# Altium PCB PCB.PcbDoc
Units mm, origin at the board's own origin, x right, y up, seen from the top; angles counter-clockwise.
Board outline 152.4 x 101.6 mm, 2 copper layers (Top Layer, Bottom Layer); 10 components, 16 nets, 68 pads, 5 vias.
Unrouted connection lines stored in the file: 1.
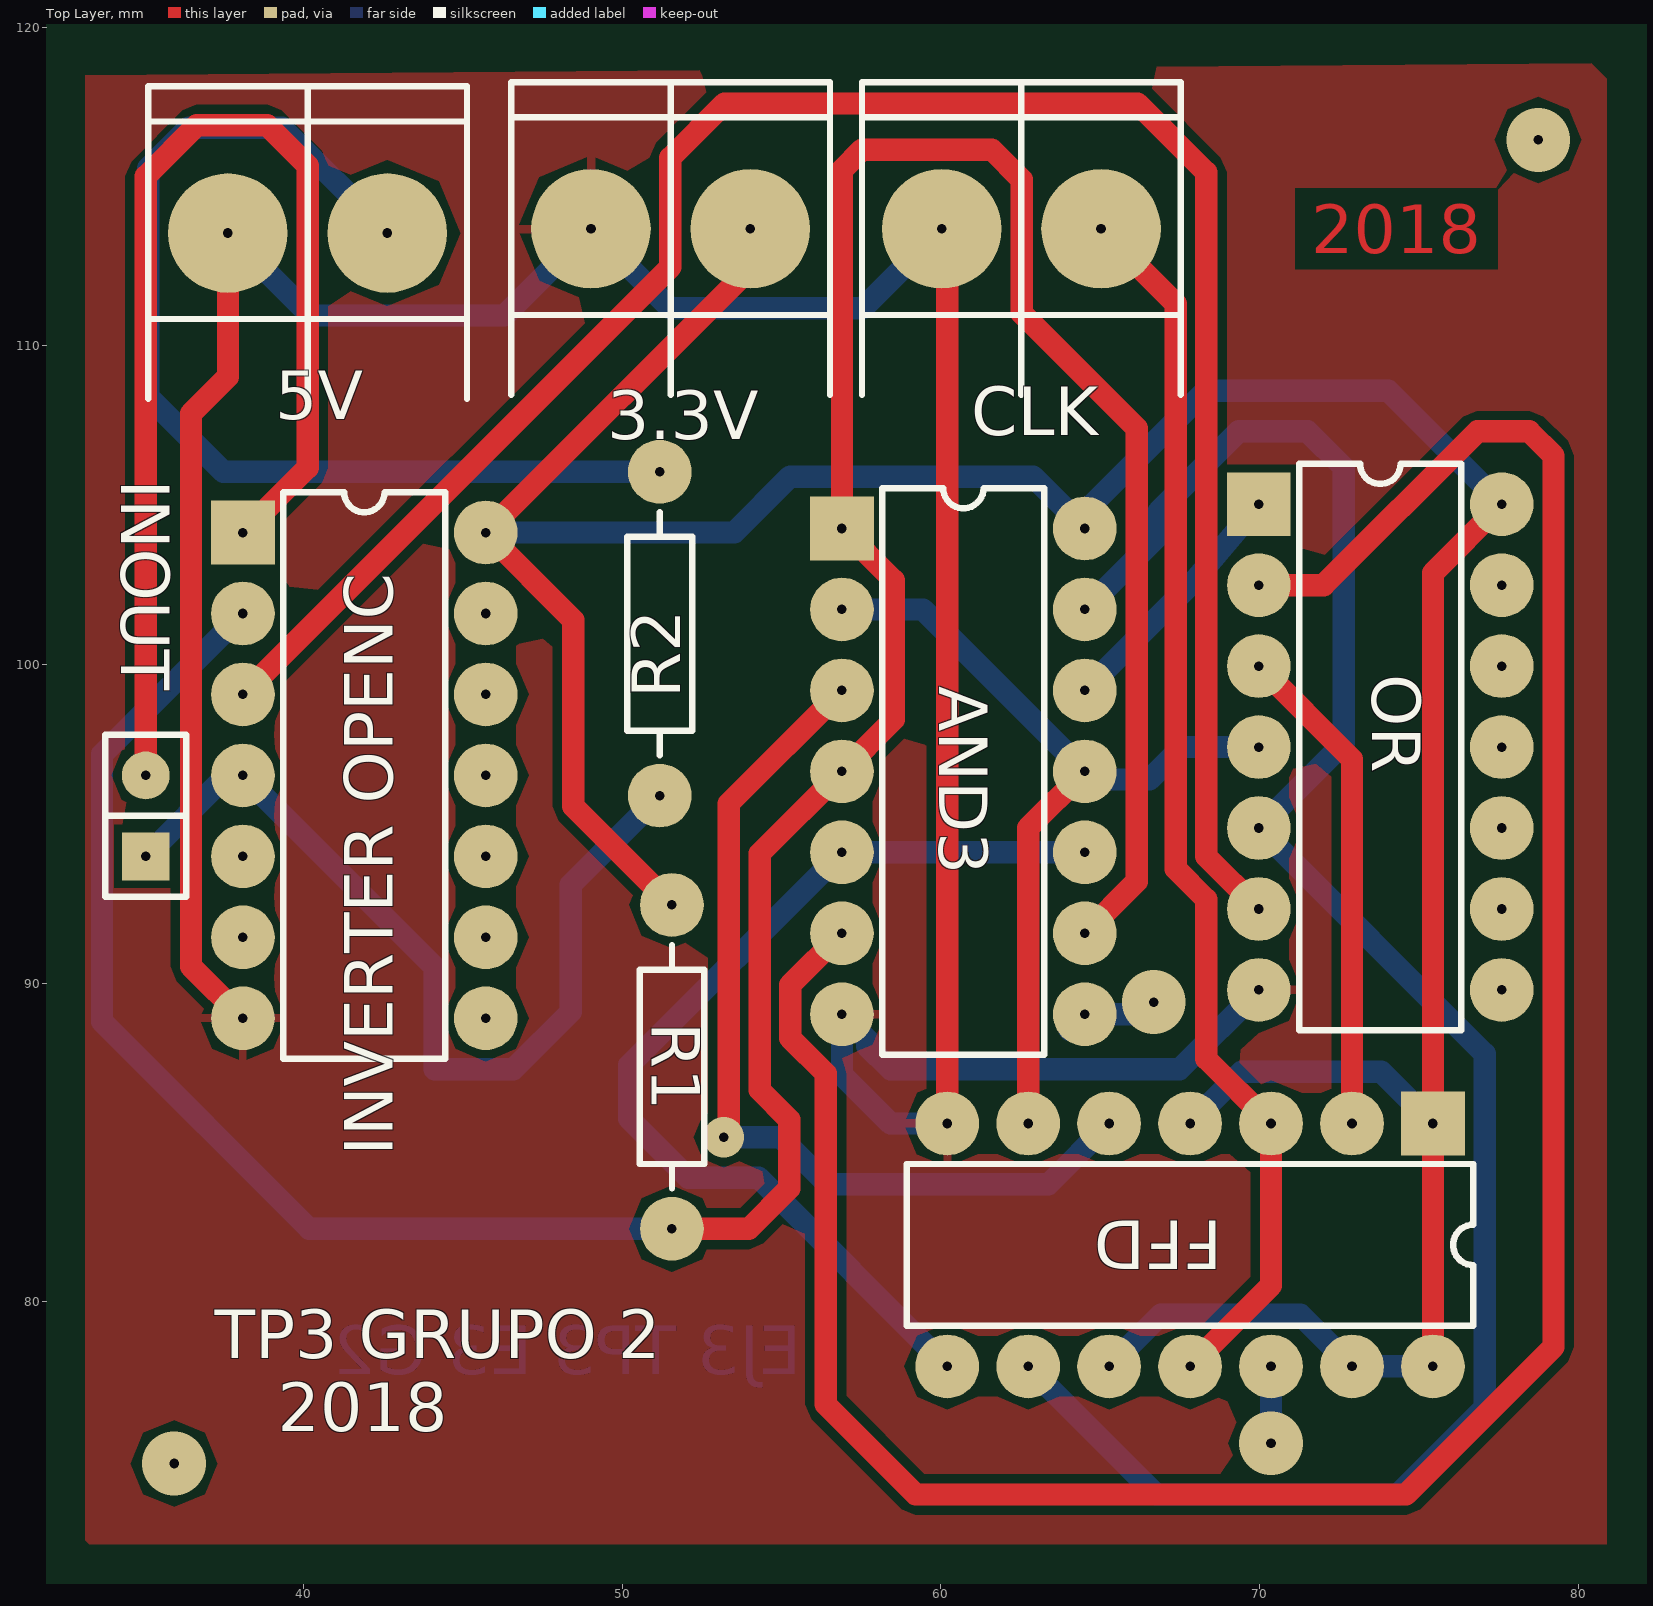
[diagram p0: Top Layer view]
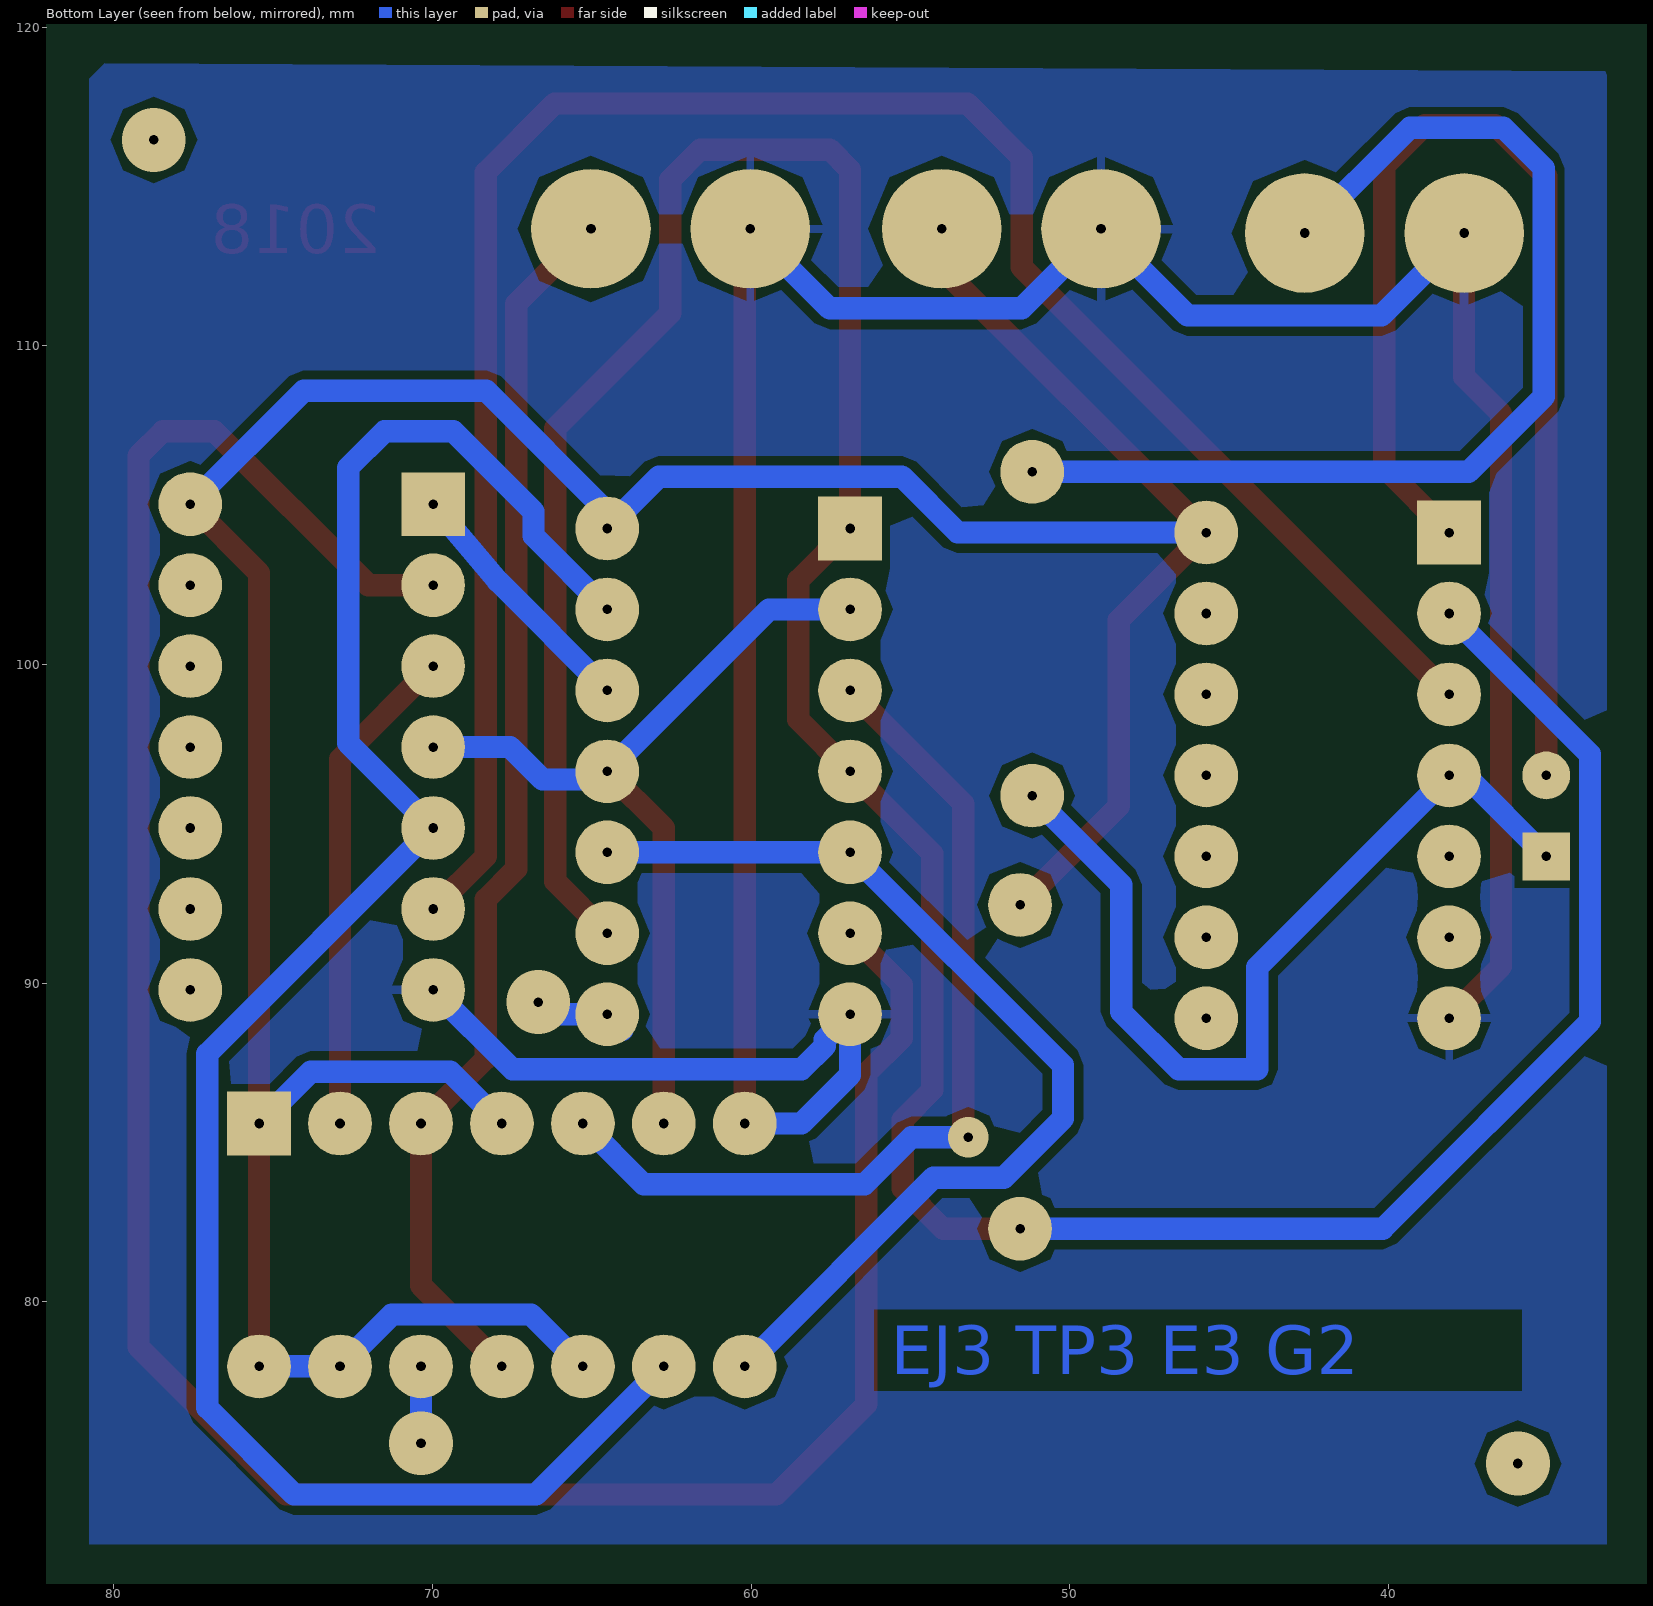
[diagram p1: Bottom Layer view, seen from below]
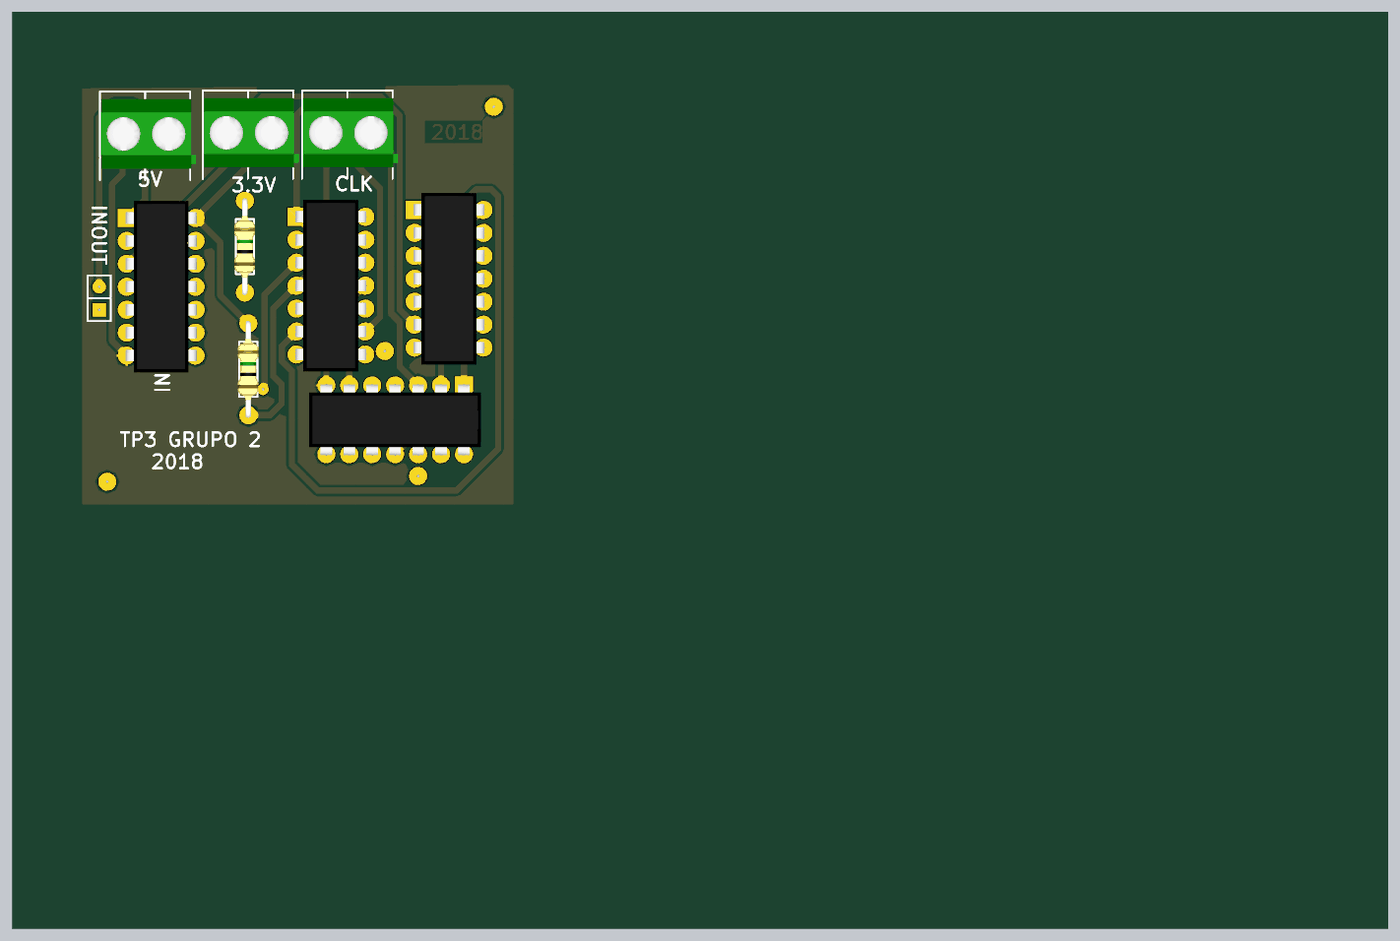
[diagram p2: 3D render of the assembled board from above, using the file's embedded part models]

## Layer stack, top to bottom
Top Solder: solder mask 0.0102, Solder Resist, Dk 3.5
Top Layer: signal copper 0.0356
Dielectric 1: dielectric 0.32, FR-4, Dk 4.8
Bottom Layer: signal copper 0.0356
Bottom Solder: solder mask 0.0102, Solder Resist, Dk 3.5

## Board outline
25.4,25.4 177.8,25.4 177.8,127 25.4,127

## Design rules (kind name [scope] priority, off if disabled: settings)
Clearance [All] p1: gap=0.254 ignorepadtopadclearanceinfootprint=FALSE except(0: Arc-Hole Track-Hole SMDPad-Hole THPad-Hole Via-Hole Fill-Hole Poly-Hole Region-Hole Text-Hole)
PolygonConnect [All] p1: connectstyle=Relief reliefconductorwidth=0.254 reliefentries=4 polygonreliefangle="90 Angle" airgapwidth=0.254
RoutingVias [All] p1: holewidth=0.711 width=1.27 viastyle="Through Hole" minholewidth=0.711 minwidth=1.27 maxholewidth=0.711 maxwidth=1.27
SolderMaskExpansion [All] p1: expansion=0.102
Width [All] p1: maxlimit=0.7 minlimit=0.7 preferedwidth=0.7 minimp=50.000000 maximp=50.000000 favimp=50.000000
30 further rules are at their usual default settings.

## Components (designator, comment, footprint, x,y, rotation, side; value= is the part's Value field where it differs from the comment)
3.3V "BORNERA 2" BORNERA2 51.522,113.665 r270 top
5V "BORNERA 2" BORNERA2 40.132,113.538 r270 top
AND3 "74HC11" DIP14 56.896,104.267 r0 top
CLK "BORNERA 2" BORNERA2 62.524,113.665 r270 top
FFD "74HC74" DIP14 75.438,85.598 r270 top
INOUT "CON2" SIP2 35.052,95.25 r90 top
"INVERTER OPENC" "74LS05" DIP14 38.1,104.14 r0 top
OR "74HC32" DIP14 69.977,105.029 r0 top
R1 "10K" RES400 51.562,82.296 r90 top
R2 "10K" RES400 51.181,95.885 r90 top

## Footprints (in the part's own frame and the unit in brackets; to place one, negate y for a bottom-side part, rotate by r counter-clockwise, add the part's x,y. Pads: shape width x height; smd on the part's side, far side on the other; paste and mask are expansions set on the pad)
BORNERA2 [mm] "Bornera con Tornillos 5mm separación"
  round 3.75 hole 0.3: 1(0,2.5) 2(0,-2.5)
  silkscreen extent -4.6,-5 5.2,5, body extent -3.76,-4.89 3.94,5.61, height 10
DIP14 [mm]
  rect 2x2 hole 0.3: 1(0,0)
  round 2 hole 0.3: 2(0,-2.54) 3(0,-5.08) 4(0,-7.62) 5(0,-10.16) 6(0,-12.7) 7(0,-15.24) 8(7.62,-15.24) 9(7.62,-12.7) 10(7.62,-10.16) 11(7.62,-7.62) 12(7.62,-5.08) 13(7.62,-2.54) 14(7.62,0)
  silkscreen extent 1.27,-16.51 6.35,1.27, body extent -0.13,-17.14 7.75,1.9, height 4.19
RES400 [mm]
  round 2 hole 0.3: 1(0,0) 2(10.16,0)
  silkscreen extent 1.27,-1.02 8.89,1.02, body extent -0.3,-1.14 10.46,1.17, height 2.43
SIP2 [mm]
  rect 1.5x1.5 hole 0.3: 1(-1.27,0)
  round 1.5 hole 0.3: 2(1.27,0)
  silkscreen extent -2.54,-1.27 2.54,1.27

## Part data
AND3 FFD "INVERTER OPENC" OR: library part IC_DIP14
R1 R2: library part RES

## Via types
v1: diameter 2, hole 0.3, Top Layer to Bottom Layer, 4 vias
v2: diameter 1.27, hole 0.3, Top Layer to Bottom Layer, 1 vias

## Nets (pads, with @x,y where several pads share a name; then routed paths per layer and width w, separated by ;. In a path a pad name is that pad's centre, name@x,y a point inside that pad or via, vN(x,y) a via of type N, cw(c..) or ccw(c..) an arc to the next point about the centre after c; other vN are vias at no path point)
+5: 5V.1 R2.2 | length 33.6
  Bottom Layer w0.7: 5V.1 39.33,116.84 36.398,116.84 35.128,115.57 35.128,108.407 37.49,106.045 R2.2
CLK: CLK.1 FFD.3 FFD.11 | length 38.9
  Top Layer w0.7: CLK.1 67.372,111.317 67.372,93.585 68.326,92.631 68.326,87.63 FFD.3 70.358,80.518 FFD.11
D1: FFD.2 OR.3 | length 15.6
  Top Layer w0.7: OR.3 72.898,97.028 FFD.2
D2: AND3.8 FFD.12 | length 5.1
  Bottom Layer w0.7: AND3.8@64.033,88.544 AND3.8 v1@66.548,89.027 ; v1(70.358,75.565) FFD.12
  other v1: 66.675,89.408
GND: 3.3V.2 5V.2 "INVERTER OPENC.7" AND3.7 CLK.2 FFD.7 OR.7 | length 101.5
  Top Layer w0.7: 5V.2 37.632,109.031 36.474,107.874 36.474,90.526 38.1,88.9 ; CLK.2 60.198,113.665 FFD.7
  Bottom Layer w0.7: 5V.2 40.223,110.947 46.304,110.947 3.3V.2 51.511,111.176 57.535,111.176 CLK.2 ; FFD.7 58.42,85.598 56.896,87.122 AND3.7 57.688,88.235 57.688,88.032 58.42,87.3 67.488,87.3 OR.7
INPUT: "INVERTER OPENC.1" INOUT.2 | length 37.4
  Top Layer w0.7: INOUT.2 35.052,115.316 36.657,116.921 38.862,116.921 40.132,115.651 40.132,106.172 38.1,104.14
O1: AND3.12 OR.1 | length 8
  Bottom Layer w0.7: AND3.12 67.945,102.616 OR.1
O2: AND3.6 OR.2 | length 81.4
  Top Layer w0.7: AND3.6 55.27,89.941 55.27,88.282 56.388,87.165 56.388,76.785 59.212,73.961 74.596,73.961 79.223,78.588 79.223,106.553 78.461,107.315 76.835,107.315 72.009,102.489 OR.2
OUTN: "INVERTER OPENC.3" OR.6 | length 64.6
  Top Layer w0.7: 38.1,99.06 51.511,112.471 51.511,115.9 53.213,117.602 66.167,117.602 68.326,115.443 68.326,93.98 OR.6
OUTPUT: "INVERTER OPENC.4" INOUT.1 R2.1 | length 28.8
  Bottom Layer w0.7: INOUT.1 37.592,96.52 38.1,96.52 44.116,90.504 44.116,87.296 46.58,87.296 48.389,89.105 48.389,93.093 R2.1
Q1: AND3.3 FFD.5 | length 29
  Top Layer w0.7: v2(53.188,85.166) 53.34,85.319 53.34,95.631 AND3.3
  Bottom Layer w0.7: v2(53.188,85.166) 54.967,85.166 56.44,83.693 63.373,83.693 FFD.5
Q1N: AND3.2 AND3.11 FFD.6 OR.4 | length 27.5
  Top Layer w0.7: FFD.6 62.738,94.869 AND3.11
  Bottom Layer w0.7: AND3.2 59.436,101.727 AND3.11 64.77,96.393 66.548,96.393 67.564,97.409 OR.4
Q2: AND3.13 FFD.9 OR.5 | length 62
  Bottom Layer w0.7: FFD.9 66.755,73.961 74.342,73.961 77.064,76.683 77.064,87.782 OR.5 72.644,97.536 72.644,106.172 71.501,107.315 69.342,107.315 66.827,104.8 66.827,104.038 AND3.13
Q2N: AND3.5 AND3.10 FFD.8 | length 31.9
  Bottom Layer w0.7: FFD.8 54.276,83.9 52.07,83.9 50.216,85.754 50.216,87.427 AND3.5 AND3.10
VCC: 3.3V.1 "INVERTER OPENC.14" AND3.14 FFD.1 FFD.4 FFD.10 FFD.13 FFD.14 OR.14 R1.2 | length 112.5
  Top Layer w0.7: R1.2 48.463,95.555 48.463,101.397 45.72,104.14 54.229,112.649 54.229,113.458 3.3V.1 ; FFD.14 FFD.1 75.438,102.87 OR.14
  Bottom Layer w0.7: 45.72,104.14 53.518,104.14 55.27,105.893 62.89,105.893 AND3.14 64.516,104.793 68.308,108.585 74.041,108.585 OR.14 ; FFD.10 66.904,79.604 71.272,79.604 FFD.13 FFD.14 ; FFD.4 69.444,87.224 73.812,87.224 FFD.1
W: "INVERTER OPENC.2" AND3.1 AND3.4 AND3.9 R1.1 | length 106.3
  Top Layer w0.7: R1.1 53.975,82.296 55.239,83.56 55.239,85.725 54.316,86.648 54.316,94.067 AND3.4 58.522,98.273 58.522,102.641 AND3.1 56.896,115.519 57.531,116.154 61.595,116.154 62.535,115.214 62.535,111.023 66.142,107.417 66.142,93.193 AND3.9
  Bottom Layer w0.7: 38.1,101.6 33.68,97.18 33.68,88.798 40.183,82.296 R1.1
pads on no net: "INVERTER OPENC.5" "INVERTER OPENC.6" "INVERTER OPENC.8" "INVERTER OPENC.9" "INVERTER OPENC.10" "INVERTER OPENC.11" "INVERTER OPENC.12" "INVERTER OPENC.13" OR.8 OR.9 OR.10 OR.11 OR.12 OR.13
copper on no net:
  other v1: 35.941,74.93 78.74,116.459

## Polygon pours and split planes (outlines as drawn)
GND on Bottom Layer (solid, remove dead copper, pour order 4): 33.02,118.618 33.147,118.491 33.147,72.39 80.772,72.39 80.772,118.874
GND on Top Layer (solid, remove dead copper, pour order 6): 33.147,118.491 33.147,72.517 33.274,72.39 80.899,72.39 80.899,118.875

## Other copper
Top Layer:
  text "2018" at 71.628,112.903 h1.52
Bottom Layer:
  text "EJ3 TP3 E3 G2" at 55.626,77.724 h1.52

## Silkscreen, mask and mechanical layers (free items; w line width, h text height)
Top Overlay:
  text "TP3 GRUPO 2 /    2018" at 37.211,75.946 h1.52